# Altium PCB mini_backplane.PcbDoc (part 4 of 5)
Units mm, origin at the board's own origin, x right, y up, seen from the top; angles counter-clockwise.
Board outline 232.03 x 195 mm, 4 copper layers (Top Layer, GND, POWER, Bottom Layer); 241 components, 200 nets, 1637 pads, 676 vias.
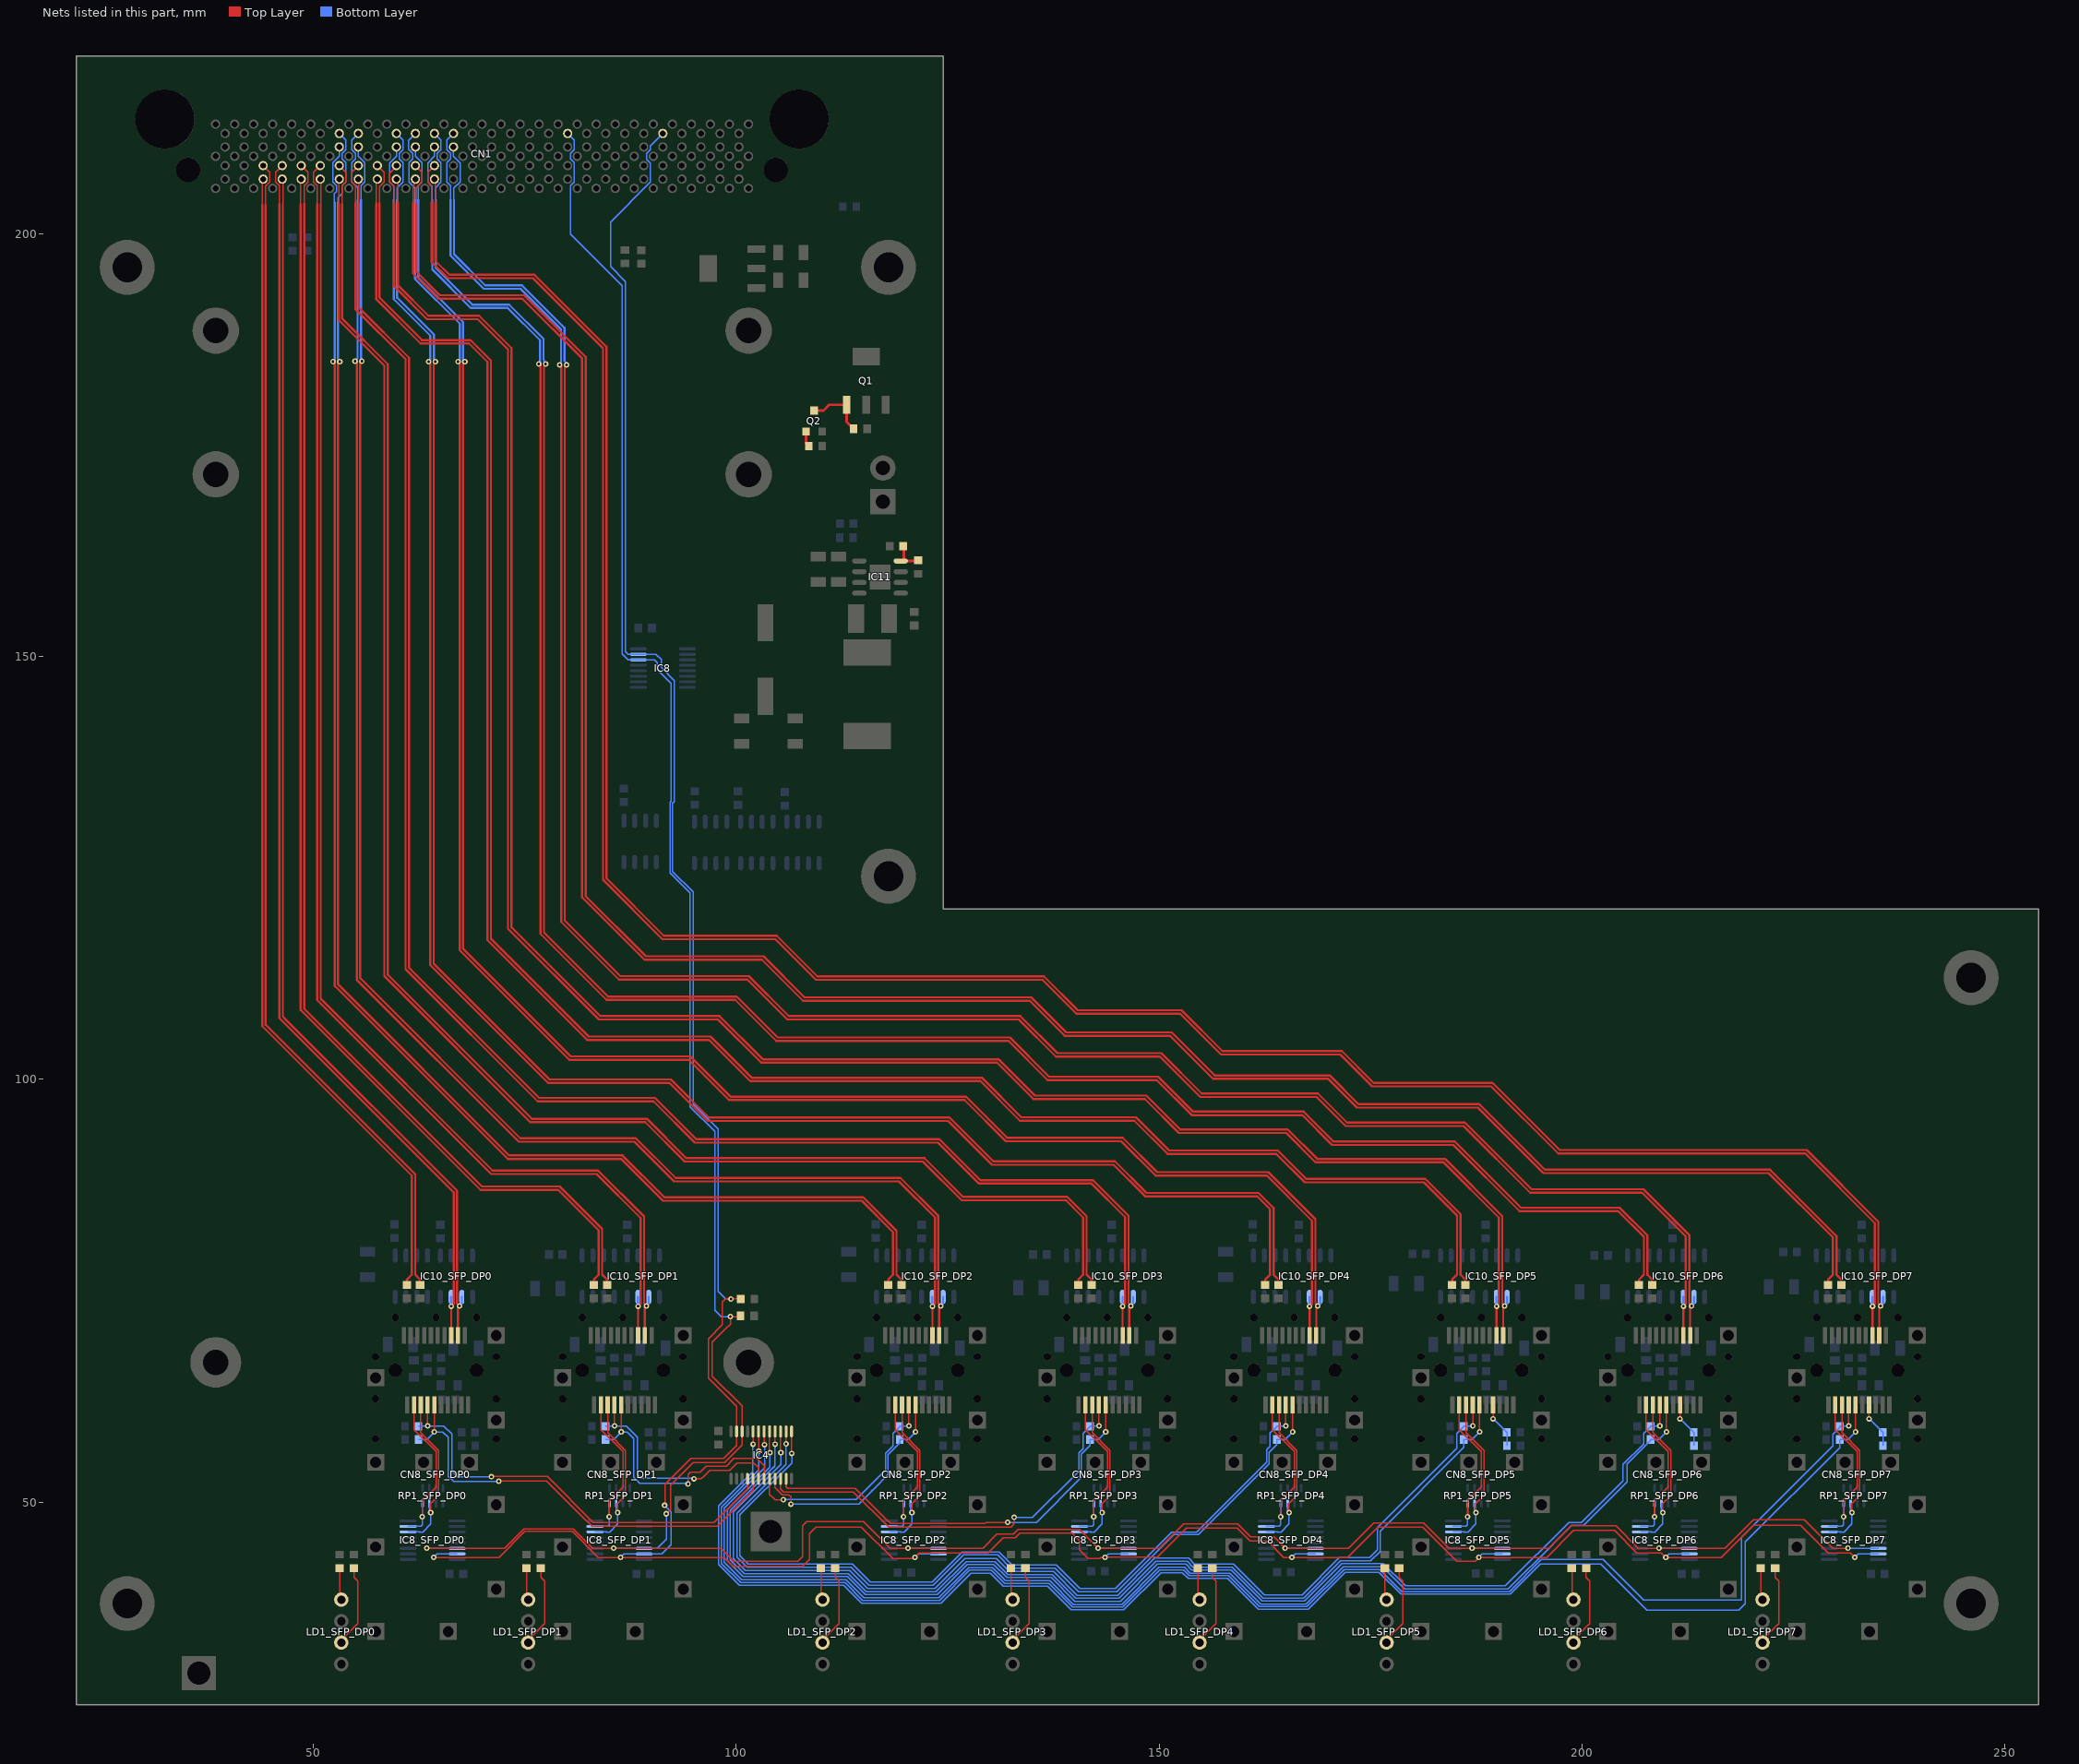
[diagram p6: the nets of this part, all layers, seen from the top]

## Via types
v1: diameter 0.66, hole 0.305, Top Layer to Bottom Layer, tented both sides, 576 vias
v2: diameter 0.711, hole 0.33, Top Layer to Bottom Layer, tented both sides, 97 vias
v3: diameter 0.66, hole 0.305, Top Layer to Bottom Layer, 3 vias

## Nets (pads, with @x,y where several pads share a name; then routed paths per layer and width w, separated by ;. In a path a pad name is that pad's centre, name@x,y a point inside that pad or via, vN(x,y) a via of type N, cw(c..) or ccw(c..) an arc to the next point about the centre after c; other vN are vias at no path point) (continued)
NetCN8_SFP_DP5_7: CN8_SFP_DP5.7 R70_SFP_DP5.2 R71_SFP_DP5.2 | length 5.5
  Top Layer w0.152: v1@189.48,59.821 CN8_SFP_DP5.7@189.48,61.494
  Bottom Layer w0.152: v1(189.484,59.842) 191.122,58.204 R71_SFP_DP5.2@191.122,56.667
NetCN8_SFP_DP6_7: CN8_SFP_DP6.7 R70_SFP_DP6.2 R71_SFP_DP6.2 | length 5.5
  Top Layer w0.152: v1@211.578,59.821 CN8_SFP_DP6.7@211.578,61.494
  Bottom Layer w0.152: v1(211.582,59.842) 213.22,58.204 R71_SFP_DP6.2@213.22,56.667
NetCN8_SFP_DP7_7: CN8_SFP_DP7.7 R70_SFP_DP7.2 R71_SFP_DP7.2 | length 5.5
  Top Layer w0.152: v1@233.93,59.821 CN8_SFP_DP7.7@233.93,61.494
  Bottom Layer w0.152: v1(233.934,59.842) 235.572,58.204 R71_SFP_DP7.2@235.572,56.667
NetIC11_4: IC11.4 R76.1 R77.2 | length 4.5
  Top Layer w0.305: R77.2@119.748,162.839 R77.2@119.748,163.043 119.812,162.979 119.812,161.214 119.745,161.28 IC11.4@119.454,161.28 121.44,161.28 R76.1@121.514,161.353
NetLD1_SFP_DP0_2: LD1_SFP_DP0.2 R9_SFP_DP0.2 | length 9.7
  Top Layer w0.152: LD1_SFP_DP0.2@53.137,33.503 55.245,35.611 55.245,40.64 54.813,41.072 R9_SFP_DP0.2@54.813,42.177
NetLD1_SFP_DP0_4: LD1_SFP_DP0.4 R10_SFP_DP0.2 | length 3.6
  Top Layer w0.152: R10_SFP_DP0.2@53.111,42.177 53.137,42.151 LD1_SFP_DP0.4@53.137,38.583
NetLD1_SFP_DP1_2: LD1_SFP_DP1.2 R9_SFP_DP1.2 | length 9.7
  Top Layer w0.152: LD1_SFP_DP1.2@75.235,33.503 77.343,35.611 77.343,40.64 76.911,41.072 R9_SFP_DP1.2@76.911,42.177
NetLD1_SFP_DP1_4: LD1_SFP_DP1.4 R10_SFP_DP1.2 | length 3.6
  Top Layer w0.152: R10_SFP_DP1.2@75.209,42.177 75.235,42.151 LD1_SFP_DP1.4@75.235,38.583
NetLD1_SFP_DP2_2: LD1_SFP_DP2.2 R9_SFP_DP2.2 | length 9.7
  Top Layer w0.152: LD1_SFP_DP2.2@110.033,33.503 112.141,35.611 112.141,40.64 111.709,41.072 R9_SFP_DP2.2@111.709,42.177
NetLD1_SFP_DP2_4: LD1_SFP_DP2.4 R10_SFP_DP2.2 | length 3.6
  Top Layer w0.152: LD1_SFP_DP2.4@110.033,38.583 R10_SFP_DP2.2@110.033,42.151
NetLD1_SFP_DP3_2: LD1_SFP_DP3.2 R9_SFP_DP3.2 | length 9.7
  Top Layer w0.152: LD1_SFP_DP3.2@132.512,33.503 134.62,35.611 134.62,40.64 134.188,41.072 R9_SFP_DP3.2@134.188,42.177
NetLD1_SFP_DP3_4: LD1_SFP_DP3.4 R10_SFP_DP3.2 | length 3.6
  Top Layer w0.152: R10_SFP_DP3.2@132.486,42.177 132.512,42.151 LD1_SFP_DP3.4@132.512,38.583
NetLD1_SFP_DP4_2: LD1_SFP_DP4.2 R9_SFP_DP4.2 | length 9.7
  Top Layer w0.152: LD1_SFP_DP4.2@154.61,33.503 156.718,35.611 156.718,40.64 156.286,41.072 R9_SFP_DP4.2@156.286,42.177
NetLD1_SFP_DP4_4: LD1_SFP_DP4.4 R10_SFP_DP4.2 | length 3.6
  Top Layer w0.152: R10_SFP_DP4.2@154.584,42.177 154.61,42.151 LD1_SFP_DP4.4@154.61,38.583
NetLD1_SFP_DP5_2: LD1_SFP_DP5.2 R9_SFP_DP5.2 | length 9.7
  Top Layer w0.152: LD1_SFP_DP5.2@176.708,33.503 178.816,35.611 178.816,40.64 178.384,41.072 R9_SFP_DP5.2@178.384,42.177
NetLD1_SFP_DP5_4: LD1_SFP_DP5.4 R10_SFP_DP5.2 | length 3.6
  Top Layer w0.152: R10_SFP_DP5.2@176.682,42.177 176.708,42.151 LD1_SFP_DP5.4@176.708,38.583
NetLD1_SFP_DP6_2: LD1_SFP_DP6.2 R9_SFP_DP6.2 | length 9.7
  Top Layer w0.152: LD1_SFP_DP6.2@198.806,33.503 200.914,35.611 200.914,40.64 200.482,41.072 R9_SFP_DP6.2@200.482,42.177
NetLD1_SFP_DP6_4: LD1_SFP_DP6.4 R10_SFP_DP6.2 | length 3.6
  Top Layer w0.152: R10_SFP_DP6.2@198.78,42.177 198.806,42.151 LD1_SFP_DP6.4@198.806,38.583
NetLD1_SFP_DP7_2: LD1_SFP_DP7.2 R9_SFP_DP7.2 | length 9.7
  Top Layer w0.152: LD1_SFP_DP7.2@221.158,33.503 223.266,35.611 223.266,40.64 222.834,41.072 R9_SFP_DP7.2@222.834,42.177
NetLD1_SFP_DP7_4: LD1_SFP_DP7.4 R10_SFP_DP7.2 | length 3.6
  Top Layer w0.152: R10_SFP_DP7.2@221.132,42.177 221.158,42.151 LD1_SFP_DP7.4@221.158,38.583
NetQ1_1: Q1.1 Q2.3 R6.1 | length 7.3
  Top Layer w0.305: Q2.3@109.22,179.075 110.318,179.075 110.993,179.751 Q1.1@113.067,179.751 113.067,177.725 R6.1@113.881,176.911
NetQ2_1: Q2.1 R11.1 | length 1.8
  Top Layer w0.305: Q2.1@108.27,176.575 108.27,175.156 R11.1@108.572,174.854
RD_OUT_SFP_DP0_N: CN1.159 CN8_SFP_DP0.12 IC10_SFP_DP0.2 | length 148.6
  Top Layer w0.152: CN1.159@46.327,206.434 46.406,206.354 46.406,203.479
  Top Layer w0.254: 46.406,203.479 46.406,107.407 47.061,106.751 ; 46.655,107.158 47.061,106.751 ; 67.109,70.841 CN8_SFP_DP0.12@67.109,69.694 67.109,72.009 ; 67.109,72.214 67.109,72.009 ; 47.061,106.751 67.005,86.808 67.005,73.482 v1(67.285,73.203) 67.109,73.027 67.109,72.009
  Bottom Layer w0.254: v1(67.285,73.203) 67.564,73.482 IC10_SFP_DP0.2@67.564,74.258
RD_OUT_SFP_DP0_P: CN1.160 CN8_SFP_DP0.13 IC10_SFP_DP0.3 | length 149.8
  Top Layer w0.152: 45.999,203.505 45.999,205.66 45.548,206.111 45.548,207.255 CN1.160@46.327,208.034
  Top Layer w0.254: 45.999,203.505 45.999,107.239 66.599,86.639 66.599,73.431 v1(66.319,73.152) ; 66.309,70.841 CN8_SFP_DP0.13@66.309,69.694 v1@66.309,73.141
  Bottom Layer w0.254: IC10_SFP_DP0.3@66.294,74.258 66.294,73.177 v1(66.319,73.152)
RD_OUT_SFP_DP1_N: CN1.153 CN8_SFP_DP1.12 IC10_SFP_DP1.2 | length 162.6
  Top Layer w0.152: CN1.153@50.827,206.434 50.876,206.384 50.876,203.505
  Top Layer w0.254: 50.876,203.505 50.876,109.525 71.196,89.205 83.658,89.205 89.103,83.76 89.103,73.482 v1(89.383,73.203) 89.207,73.027 89.207,72.009 ; 89.207,70.841 CN8_SFP_DP1.12@89.207,69.694 89.207,72.009 ; 89.207,72.214 89.207,72.009
  Bottom Layer w0.254: v1(89.383,73.203) 89.662,73.482 IC10_SFP_DP1.2@89.662,74.258
RD_OUT_SFP_DP1_P: CN1.154 CN8_SFP_DP1.13 IC10_SFP_DP1.3 | length 164.3
  Top Layer w0.152: 50.47,203.479 50.48,203.49 50.48,205.679 50.048,206.111 50.048,207.255 CN1.154@50.827,208.034
  Top Layer w0.254: 50.47,203.479 50.47,109.356 71.028,88.798 83.49,88.798 88.697,83.591 88.697,73.431 v1(88.417,73.152) ; 88.407,70.841 CN8_SFP_DP1.13@88.407,69.694 v1@88.407,73.141
  Bottom Layer w0.254: IC10_SFP_DP1.3@88.392,74.258 88.392,73.177 v1(88.417,73.152)
RD_OUT_SFP_DP2_N: CN1.24 CN8_SFP_DP2.12 IC10_SFP_DP2.2 | length 196.1
  Top Layer w0.254: v1(55.753,184.912) 55.55,184.709 55.55,111.938 74.473,93.015 88.138,93.015 92.837,88.316 119.405,88.316 123.901,83.82 123.901,73.482 v1(124.181,73.203) 124.005,73.027 124.005,72.009 ; 124.005,70.841 CN8_SFP_DP2.12@124.005,69.694 124.005,72.009 ; 124.005,72.214 124.005,72.009
  Bottom Layer w0.152: CN1.24@55.327,210.234 55.327,209.157 56.105,208.379 56.105,206.088 55.651,205.635 55.651,203.581
  Bottom Layer w0.254: 55.651,203.962 55.651,203.581 55.651,185.014 v1(55.753,184.912) ; v1(124.181,73.203) 124.46,73.482 IC10_SFP_DP2.2@124.46,74.258
RD_OUT_SFP_DP2_P: CN1.23 CN8_SFP_DP2.13 IC10_SFP_DP2.3 | length 197.7
  Top Layer w0.254: v1(54.94,184.912) 55.143,184.709 55.143,111.769 74.304,92.608 87.97,92.608 92.669,87.909 119.237,87.909 123.495,83.652 123.495,73.431 v1(123.215,73.152) ; 123.205,70.841 CN8_SFP_DP2.13@123.205,69.694 v1@123.205,73.141
  Bottom Layer w0.152: 55.245,203.759 55.245,205.413 54.548,206.11 54.548,208.379 54.98,208.811 54.98,209.479 54.548,209.911 54.548,211.055 CN1.23@55.327,211.834
  Bottom Layer w0.254: v1(54.94,184.912) 54.94,184.961 55.245,185.266 55.245,203.759 55.245,203.911 ; v1@123.19,73.177 IC10_SFP_DP2.3@123.19,74.258
RD_OUT_SFP_DP3_N: CN1.147 CN8_SFP_DP3.12 IC10_SFP_DP3.2 | length 209.8
  Top Layer w0.152: CN1.147@55.327,206.434 55.387,206.373 55.387,203.571
  Top Layer w0.254: 55.387,203.571 55.387,191.237 61.316,185.309 61.316,113.182 76.708,97.79 90.399,97.79 95.275,92.913 124.028,92.913 128.88,88.062 142.18,88.062 146.38,83.861 146.38,73.482 v1(146.66,73.203) 146.484,73.027 146.484,72.009 ; 146.484,70.841 CN8_SFP_DP3.12@146.484,69.694 146.484,72.009 ; 146.484,72.214 146.484,72.009
  Bottom Layer w0.254: v1(146.66,73.203) 146.939,73.482 IC10_SFP_DP3.2@146.939,74.258
RD_OUT_SFP_DP3_P: CN1.148 CN8_SFP_DP3.13 IC10_SFP_DP3.3 | length 211.6
  Top Layer w0.152: 54.981,203.632 54.981,205.655 54.548,206.088 54.548,207.255 CN1.148@55.327,208.034
  Top Layer w0.254: 54.981,203.632 54.981,191.069 60.909,185.141 60.909,113.014 76.54,97.384 90.23,97.384 95.107,92.507 123.86,92.507 128.711,87.655 142.011,87.655 145.974,83.693 145.974,73.431 v1(145.694,73.152) ; 145.684,70.841 CN8_SFP_DP3.13@145.684,69.694 v1@145.684,73.141
  Bottom Layer w0.254: IC10_SFP_DP3.3@145.669,74.258 145.669,73.177 v1(145.694,73.152)
RD_OUT_SFP_DP4_N: CN1.33 CN8_SFP_DP4.12 IC10_SFP_DP4.2 | length 228.6
  Top Layer w0.254: v1(67.92,184.836) 67.716,184.633 67.716,115.418 80.442,102.692 94.564,102.692 99.314,97.942 127.152,97.942 132.029,93.066 145.694,93.066 149.758,89.002 162.906,89.002 168.478,83.43 168.478,73.482 v1(168.758,73.203) 168.582,73.027 168.582,72.009 ; 168.582,70.841 CN8_SFP_DP4.12@168.582,69.694 168.582,72.009 ; 168.582,72.214 168.582,72.009
  Bottom Layer w0.152: CN1.33@62.077,210.234 62.077,209.157 62.855,208.379 62.855,206.088 62.423,205.656 62.423,203.709
  Bottom Layer w0.254: 62.422,203.987 62.422,203.708 62.422,194.804 67.716,189.509 67.716,185.522 ; 67.716,185.369 67.716,185.522 ; v1(67.92,184.836) 67.716,185.039 67.716,185.522 ; v1(168.758,73.203) 169.037,73.482 IC10_SFP_DP4.2@169.037,74.258
RD_OUT_SFP_DP4_P: CN1.32 CN8_SFP_DP4.13 IC10_SFP_DP4.3 | length 230.9
  Top Layer w0.254: v1@67.31,184.836 v1(67.107,184.836) 67.31,184.633 67.31,115.249 80.273,102.286 94.396,102.286 99.146,97.536 126.984,97.536 131.861,92.659 145.526,92.659 149.59,88.595 162.738,88.595 168.072,83.261 168.072,73.431 v1(167.792,73.152) ; 167.782,70.841 CN8_SFP_DP4.13@167.782,69.694 v1@167.782,73.141
  Bottom Layer w0.152: 62.016,203.987 62.016,205.393 61.298,206.111 61.298,208.379 61.73,208.811 61.73,209.479 61.247,209.962 61.247,211.004 CN1.32@62.077,211.834
  Bottom Layer w0.254: 62.016,203.987 62.016,194.635 67.31,189.341 67.31,186.106 ; v1(67.107,184.836) 67.31,185.039 67.31,186.106 ; 67.31,185.369 67.31,186.106 ; IC10_SFP_DP4.3@167.767,74.258 167.767,73.177 v1(167.792,73.152)
RD_OUT_SFP_DP5_N: CN1.141 CN8_SFP_DP5.12 IC10_SFP_DP5.2 | length 245.7
  Top Layer w0.152: CN1.141@59.827,206.434 59.995,206.265 59.995,203.632
  Top Layer w0.254: 59.995,203.632 59.995,193.894 63.618,190.271 69.612,190.271 73.431,186.452 73.431,117.958 83.922,107.467 98.019,107.467 103.124,102.362 131.013,102.362 135.306,98.069 148.488,98.069 152.502,94.056 165.202,94.056 168.681,90.576 183.81,90.576 190.576,83.811 190.576,73.482 v1(190.856,73.203) 190.68,73.027 190.68,72.009 ; 190.68,70.841 CN8_SFP_DP5.12@190.68,69.694 190.68,72.009 ; 190.68,72.214 190.68,72.009
  Bottom Layer w0.254: v1(190.856,73.203) 191.135,73.482 IC10_SFP_DP5.2@191.135,74.258
RD_OUT_SFP_DP5_P: CN1.142 CN8_SFP_DP5.13 IC10_SFP_DP5.3 | length 247.5
  Top Layer w0.152: 59.588,203.581 59.588,205.548 59.048,206.088 59.048,207.155 59.827,207.934 CN1.142@59.827,208.034
  Top Layer w0.254: 59.588,203.581 59.588,193.726 63.449,189.865 69.444,189.865 73.025,186.284 73.025,117.789 83.753,107.061 97.85,107.061 102.956,101.956 130.845,101.956 135.137,97.663 148.32,97.663 152.333,93.65 165.033,93.65 168.513,90.17 183.642,90.17 190.17,83.642 190.17,73.431 v1(189.89,73.152) ; 189.88,70.841 CN8_SFP_DP5.13@189.88,69.694 v1@189.88,73.141
  Bottom Layer w0.254: IC10_SFP_DP5.3@189.865,74.258 189.865,73.177 v1(189.89,73.152)
RD_OUT_SFP_DP6_N: CN1.39 CN8_SFP_DP6.12 IC10_SFP_DP6.2 | length 263.2
  Top Layer w0.254: v1(79.934,184.48) 79.731,184.277 79.731,118.77 86.309,112.192 101.498,112.192 106.223,107.467 133.579,107.467 137.973,103.073 150.266,103.073 155.042,98.298 168.783,98.298 172.212,94.869 186.157,94.869 194.031,86.995 207.255,86.995 212.674,81.575 212.674,73.482 v1(212.954,73.203) 212.778,73.027 212.778,72.009 ; 212.778,70.841 CN8_SFP_DP6.12@212.778,69.694 212.778,72.009 ; 212.778,72.214 212.778,72.009
  Bottom Layer w0.152: CN1.39@66.577,210.234 66.577,209.135 67.355,208.356 67.355,206.088 66.637,205.371 66.637,203.987
  Bottom Layer w0.254: 66.637,203.987 66.637,197.561 70.32,193.878 74.667,193.878 79.705,188.84 79.705,184.937 79.934,184.709 v1(79.934,184.48) ; v1(212.954,73.203) 213.233,73.482 IC10_SFP_DP6.2@213.233,74.258
RD_OUT_SFP_DP6_P: CN1.38 CN8_SFP_DP6.13 IC10_SFP_DP6.3 | length 266.1
  Top Layer w0.254: v1(79.121,184.48) 79.324,184.277 79.324,118.602 86.141,111.785 101.33,111.785 106.054,107.061 133.41,107.061 137.804,102.667 150.098,102.667 154.873,97.892 168.615,97.892 172.044,94.463 185.988,94.463 193.862,86.589 207.086,86.589 212.268,81.407 212.268,73.431 v1(211.988,73.152) ; 211.978,70.841 CN8_SFP_DP6.13@211.978,69.694 v1@211.978,73.141
  Bottom Layer w0.152: 66.231,203.987 66.231,205.678 65.798,206.111 65.798,208.379 66.23,208.811 66.23,209.479 65.798,209.911 65.798,211.055 CN1.38@66.577,211.834
  Bottom Layer w0.254: 66.231,203.987 66.231,197.393 70.152,193.472 74.498,193.472 79.299,188.671 79.299,186.69 ; v1(79.121,184.48) 79.299,184.658 79.299,186.69 ; 79.299,185.242 79.299,186.69 ; IC10_SFP_DP6.3@211.963,74.258 211.963,73.177 v1(211.988,73.152)
RD_OUT_SFP_DP7_N: CN1.135 CN8_SFP_DP7.12 IC10_SFP_DP7.2 | length 287.2
  Top Layer w0.152: CN1.135@64.327,206.434 64.44,206.32 64.44,203.657
  Top Layer w0.254: 64.44,203.581 64.44,196.774 ; 64.44,203.657 64.44,196.774 ; 235.13,70.841 CN8_SFP_DP7.12@235.13,69.694 235.13,72.009 ; 235.13,72.214 235.13,72.009 ; 64.44,196.774 66.091,195.123 76.14,195.123 84.658,186.604 84.658,123.749 91.44,116.967 104.8,116.967 109.601,112.166 136.373,112.166 140.386,108.153 152.654,108.153 157.48,103.327 171.602,103.327 175.362,99.568 189.408,99.568 197.358,91.618 226.559,91.618 235.026,83.15 235.026,73.482 v1(235.306,73.203) 235.13,73.027 235.13,72.009
  Bottom Layer w0.254: v1(235.306,73.203) 235.585,73.482 IC10_SFP_DP7.2@235.585,74.258
RD_OUT_SFP_DP7_P: CN1.136 CN8_SFP_DP7.13 IC10_SFP_DP7.3 | length 282.1
  Top Layer w0.152: 63.981,203.657 63.981,205.678 63.548,206.111 63.548,207.255 CN1.136@64.327,208.034
  Top Layer w0.254: 63.981,203.657 63.981,196.658 65.922,194.716 75.971,194.716 84.252,186.436 84.252,123.58 91.272,116.561 104.632,116.561 109.433,111.76 136.204,111.76 140.217,107.747 152.486,107.747 157.312,102.921 171.434,102.921 175.193,99.162 189.239,99.162 197.19,91.211 226.39,91.211 234.62,82.982 234.62,73.431 v1(234.34,73.152) ; 234.33,70.841 CN8_SFP_DP7.13@234.33,69.694 v1@234.33,73.141
  Bottom Layer w0.254: IC10_SFP_DP7.3@234.315,74.258 234.315,73.177 v1(234.34,73.152)
SCL_AUX: CN1.56 IC4.22 IC8.14 IC8_SFP_DP0.14 IC8_SFP_DP1.14 IC8_SFP_DP2.14 IC8_SFP_DP3.14 IC8_SFP_DP4.14 IC8_SFP_DP5.14 IC8_SFP_DP6.14 IC8_SFP_DP7.14 R3.1 | length 407.4
  Top Layer w0.152: v1(63.424,44.552) 72.619,44.552 74.905,46.838 80.746,46.838 83.032,44.552 v1(85.522,44.552) 98.196,44.552 99.746,43.002 107.315,43.002 107.874,43.561 107.874,47.193 108.356,47.676 115.062,47.676 118.186,44.552 v1(120.32,44.552) 129.159,44.552 130.835,46.228 132.766,46.228 133.299,46.761 140.589,46.761 v1(142.799,44.552) 150.038,44.552 152.883,47.396 159.283,47.396 160.807,45.872 163.576,45.872 v1(164.897,44.552) 172.39,44.552 175.387,47.549 181.28,47.549 184.277,44.552 v1(186.995,44.552) 196.063,44.552 198.704,47.193 204.013,47.193 206.654,44.552 v1(209.093,44.552) 216.865,44.552 220.243,47.93 226.263,47.93 229.641,44.552 v1(231.445,44.552) ; v1(91.745,48.616) 92.227,49.098 92.227,51.994 94.92,54.686 98.628,54.686 100.697,56.755 IC4.22@100.697,58.35 100.697,61.355 97.18,64.872 97.18,68.91 98.628,70.358 ; 98.958,70.688 98.628,70.358 ; R3.1@100.521,72.009 100.444,71.933 v1(99.314,71.933) 99.314,71.044 98.628,70.358
  Bottom Layer w0.152: v1(63.424,44.552) 66.974,44.552 IC8_SFP_DP0.14@67.01,44.516 ; CN1.56@80.077,211.834 80.855,211.055 80.855,209.911 80.423,209.479 80.423,208.811 80.855,208.379 80.855,206.088 80.423,205.656 80.423,199.92 86.538,193.805 86.538,190.246 ; v1(85.522,44.552) 89.072,44.552 IC8_SFP_DP1.14@89.108,44.516 90.643,44.516 91.745,45.618 v1(91.745,48.616) ; 86.538,190.729 86.538,190.246 ; v1(99.314,71.933) 98.222,71.933 97.46,72.695 97.46,93.828 94.544,96.744 94.544,122.016 92.177,124.383 92.177,132.74 92.329,132.893 92.329,146.787 90.678,148.438 90.678,149.276 90.363,149.59 IC8.14@88.438,149.59 87.214,149.59 86.538,150.266 86.538,190.246 ; v1(120.32,44.552) 123.87,44.552 IC8_SFP_DP2.14@123.906,44.516 ; v1(142.799,44.552) 146.349,44.552 IC8_SFP_DP3.14@146.385,44.516 ; v1(164.897,44.552) 168.447,44.552 IC8_SFP_DP4.14@168.483,44.516 ; v1(186.995,44.552) 190.545,44.552 IC8_SFP_DP5.14@190.581,44.516 ; v1(209.093,44.552) 212.643,44.552 IC8_SFP_DP6.14@212.679,44.516 ; v1(231.445,44.552) 234.995,44.552 IC8_SFP_DP7.14@235.031,44.516
SCL_SFP0: CN8_SFP_DP0.5 IC4.5 R22_SFP_DP0.1 | length 54.6
  Top Layer w0.152: CN8_SFP_DP0.5@64.309,61.494 64.309,58.297 v1(64.313,58.293) ; v1(71.933,52.476) 77.597,52.476 81.763,48.311 81.765,48.311 82.959,47.117 88.671,47.117 ; 89.611,47.117 88.671,47.117 ; IC4.5@101.997,52.75 101.997,51.374 97.739,47.117 88.671,47.117
  Bottom Layer w0.152: R22_SFP_DP0.1@62.446,57.404 63.424,57.404 v1(64.313,58.293) 65.329,58.293 65.964,57.658 65.964,53.061 66.599,52.426 71.882,52.426 v1(71.933,52.476)
SCL_SFP1: CN8_SFP_DP1.5 IC4.7 R22_SFP_DP1.1 | length 31.3
  Top Layer w0.152: CN8_SFP_DP1.5@86.407,61.494 86.407,58.297 v1(86.411,58.293) ; v1(94.31,52.146) 94.31,53.238 94.615,53.543 95.733,53.543 96.431,54.242 98.844,54.242 99.746,55.143 102.464,55.143 103.297,54.31 IC4.7@103.297,52.75
  Bottom Layer w0.152: R22_SFP_DP1.1@84.544,57.404 85.522,57.404 v1(86.411,58.293) 87.122,58.293 87.909,57.506 87.909,52.908 88.621,52.197 94.259,52.197 v1(94.31,52.146)
SCL_SFP2: CN8_SFP_DP2.5 IC4.9 R22_SFP_DP2.1 | length 27.8
  Top Layer w0.152: IC4.9@104.597,52.75 104.597,51.715 105.435,50.876 106.223,50.876 106.477,50.622 v1(106.477,49.759) ; CN8_SFP_DP2.5@121.205,61.494 121.205,58.297 v1(121.209,58.293)
  Bottom Layer w0.152: v1(106.477,49.759) 114.478,49.759 116.345,51.625 ; 116.002,51.283 116.345,51.625 ; v1(121.209,58.293) 120.32,57.404 R22_SFP_DP2.1@119.342,57.404 119.342,57.01 117.958,55.626 117.958,53.238 116.345,51.625
SCL_SFP3: CN8_SFP_DP3.5 IC4.11 R22_SFP_DP3.1 | length 50.3
  Top Layer w0.152: IC4.11@105.897,52.75 105.897,51.812 106.096,51.613 114.071,51.613 117.551,48.133 117.577,48.133 118.262,47.447 129.388,47.447 129.54,47.6 v1(132.08,47.6) ; CN8_SFP_DP3.5@143.684,61.494 143.684,58.297 v1(143.688,58.293)
  Bottom Layer w0.152: v1(132.08,47.6) 135.509,47.6 140.818,52.908 140.818,55.677 141.821,56.68 R22_SFP_DP3.1@141.821,57.404 142.799,57.404 v1(143.688,58.293)
SCL_SFP4: CN8_SFP_DP4.5 IC4.14 R22_SFP_DP4.1 | length 99.8
  Top Layer w0.152: v1(105.893,56.871) 105.897,56.875 IC4.14@105.897,58.35 ; CN8_SFP_DP4.5@165.782,61.494 165.782,58.297 v1(165.786,58.293)
  Bottom Layer w0.152: v1(105.893,56.871) 105.893,54.477 100.076,48.661 100.076,43.491 101.276,42.291 113.595,42.291 115.703,40.183 123.311,40.183 126.867,43.739 130.917,43.739 132.467,42.189 137.699,42.189 140.493,39.395 144.983,39.395 151.74,46.152 154.661,46.152 163.017,54.508 163.017,55.88 163.919,56.782 R22_SFP_DP4.1@163.919,57.404 164.897,57.404 v1(165.786,58.293)
SCL_SFP5: CN8_SFP_DP5.5 IC4.16 R22_SFP_DP5.1 | length 128.1
  Top Layer w0.152: v1(104.597,56.845) IC4.16@104.597,58.35 ; CN8_SFP_DP5.5@187.88,61.494 187.88,58.297 v1(187.884,58.293)
  Bottom Layer w0.152: 104.496,54.194 104.196,53.894 ; v1(104.597,56.845) 104.597,54.295 104.196,53.894 ; v1(187.884,58.293) 186.995,57.404 R22_SFP_DP5.1@186.017,57.404 186.017,56.451 176.124,46.558 176.124,44.171 175.006,43.053 171.461,43.053 167.067,38.659 162.29,38.659 158.633,42.316 153.985,42.316 153.324,42.977 149.647,42.977 145.278,38.608 140.167,38.608 137.373,41.402 132.141,41.402 130.591,42.951 127.193,42.951 123.637,39.395 115.377,39.395 113.268,41.504 100.949,41.504 99.289,43.164 99.289,48.987 104.196,53.894
SCL_SFP6: CN8_SFP_DP6.5 IC4.18 R22_SFP_DP6.1 | length 153.1
  Top Layer w0.152: IC4.18@103.297,58.35 103.297,56.85 v1(103.353,56.794) ; CN8_SFP_DP6.5@209.978,61.494 209.978,58.297 v1(209.982,58.293)
  Bottom Layer w0.152: v1(103.353,56.794) 103.353,54.057 98.577,49.281 98.577,42.87 100.655,40.792 112.974,40.792 115.082,38.684 123.932,38.684 127.488,42.24 130.297,42.24 131.846,40.691 137.078,40.691 139.872,37.897 145.573,37.897 149.942,42.266 153.03,42.266 153.69,41.605 158.338,41.605 161.996,37.948 167.361,37.948 171.756,42.342 176.428,42.342 179.045,39.726 187.249,39.726 ; 186.741,39.726 187.249,39.726 ; v1(209.982,58.293) 209.093,57.404 R22_SFP_DP6.1@208.115,57.404 208.115,57.3 205.308,54.493 205.308,52.375 200.177,47.244 198.755,47.244 196.52,45.009 196.52,44.983 191.262,39.726 187.249,39.726
SCL_SFP7: CN8_SFP_DP7.5 IC4.20 R22_SFP_DP7.1 | length 184
  Top Layer w0.152: IC4.20@101.997,58.35 101.997,56.855 v1(102.006,56.845) ; CN8_SFP_DP7.5@232.33,61.494 232.33,58.297 v1(232.334,58.293)
  Bottom Layer w0.152: v1(102.006,56.845) 101.974,56.813 101.974,53.576 97.942,49.544 97.942,42.607 100.392,40.157 112.711,40.157 114.819,38.049 124.195,38.049 127.751,41.605 130.034,41.605 131.583,40.056 136.815,40.056 139.609,37.262 145.836,37.262 150.205,41.631 152.767,41.631 153.427,40.97 158.075,40.97 161.733,37.313 167.624,37.313 172.019,41.707 175.997,41.707 178.587,39.116 191.515,39.116 195.096,42.697 202.209,42.697 207.696,37.211 218.542,37.211 219.304,37.973 219.304,45.263 230.454,56.413 230.454,57.391 R22_SFP_DP7.1@230.467,57.404 231.445,57.404 v1(232.334,58.293)
SDA_AUX: CN1.71 IC4.23 IC8.15 IC8_SFP_DP0.15 IC8_SFP_DP1.15 IC8_SFP_DP2.15 IC8_SFP_DP3.15 IC8_SFP_DP4.15 IC8_SFP_DP5.15 IC8_SFP_DP6.15 IC8_SFP_DP7.15 R4.1 | length 407.3
  Top Layer w0.152: v1(64.237,43.459) 71.958,43.459 75.032,46.533 80.62,46.533 83.693,43.459 v1(86.335,43.459) 98.552,43.459 99.593,42.418 107.848,42.418 108.661,43.231 108.661,46.253 109.449,47.041 114.783,47.041 118.516,43.307 120.98,43.307 v1(121.133,43.459) 121.666,43.993 129.794,43.993 131.572,45.771 132.994,45.771 133.553,46.33 139.7,46.33 140.602,45.428 140.602,44.336 141.63,43.307 142.951,43.307 143.104,43.459 v1(143.612,43.459) 143.618,43.466 149.79,43.466 153.238,46.914 159.233,46.914 160.757,45.39 162.814,45.39 164.744,43.459 v1(165.71,43.459) 172.263,43.459 175.844,47.041 181.178,47.041 185.217,43.002 187.35,43.002 v1(187.808,43.459) 195.809,43.459 198.984,46.634 203.835,46.634 206.477,43.993 209.372,43.993 v1(209.906,43.459) 216.459,43.459 220.269,47.269 225.806,47.269 229.083,43.993 231.724,43.993 v1(232.258,43.459) ; v1(91.542,49.606) 91.592,49.657 91.592,52.121 94.64,55.169 98.527,55.169 100.047,56.689 IC4.23@100.047,58.35 100.047,61.32 96.698,64.668 96.698,69.317 98.374,70.993 98.374,73.635 98.755,74.016 v1(99.39,74.016) 100.521,74.016 R4.1@100.546,73.99
  Bottom Layer w0.152: v1(64.237,43.459) 64.644,43.866 IC8_SFP_DP0.15@67.01,43.866 ; v1(86.335,43.459) 86.742,43.866 IC8_SFP_DP1.15@89.108,43.866 91.187,43.866 92.304,44.983 92.304,48.847 91.544,49.606 v1(91.542,49.606) ; 86.919,190.348 86.919,189.992 ; CN1.71@91.327,211.834 89.855,210.362 89.855,209.911 89.423,209.479 89.423,208.788 89.855,208.356 89.855,206.088 85.141,201.374 85.141,196.113 86.919,194.335 86.919,189.992 ; v1(99.39,74.016) 98.755,74.016 97.866,74.905 97.866,94.107 94.894,97.079 94.894,122.149 92.481,124.562 92.481,132.614 92.71,132.843 92.71,147.117 91.135,148.692 91.135,149.631 90.526,150.24 IC8.15@88.438,150.24 87.224,150.24 86.919,150.546 86.919,189.992 ; v1(121.133,43.459) 121.54,43.866 IC8_SFP_DP2.15@123.906,43.866 ; v1(143.612,43.459) 144.019,43.866 IC8_SFP_DP3.15@146.385,43.866 ; v1(165.71,43.459) 166.117,43.866 IC8_SFP_DP4.15@168.483,43.866 ; v1(187.808,43.459) 188.215,43.866 IC8_SFP_DP5.15@190.581,43.866 ; v1(209.906,43.459) 210.313,43.866 IC8_SFP_DP6.15@212.679,43.866 ; v1(232.258,43.459) 232.665,43.866 IC8_SFP_DP7.15@235.031,43.866
SDA_SFP0: CN8_SFP_DP0.4 IC4.4 R21_SFP_DP0.1 | length 51.7
  Top Layer w0.152: v1@63.509,59.021 CN8_SFP_DP0.4@63.509,61.494 ; v1(71.069,52.984) 71.12,53.035 77.673,53.035 83.109,47.6 89.51,47.6 ; 89.611,47.6 89.51,47.6 ; IC4.4@101.347,52.75 101.347,51.563 97.384,47.6 89.51,47.6
  Bottom Layer w0.152: R21_SFP_DP0.1@62.446,58.953 62.497,59.004 v1(63.525,59.004) 65.43,59.004 66.396,58.039 66.396,53.619 67.031,52.984 v1(71.069,52.984)
SDA_SFP1: CN8_SFP_DP1.4 IC4.6 R21_SFP_DP1.1 | length 30.1
  Top Layer w0.152: CN8_SFP_DP1.4@85.607,61.494 85.607,59.021 v1(85.623,59.004) ; v1(95.021,52.756) 95.86,52.756 96.164,53.061 ; 95.91,52.807 96.164,53.061 ; IC4.6@102.647,52.75 102.647,54.046 102.057,54.635 100.101,54.635 99.225,53.759 96.863,53.759 96.164,53.061
  Bottom Layer w0.152: R21_SFP_DP1.1@84.544,58.953 84.595,59.004 v1(85.623,59.004) 86.995,59.004 88.341,57.658 88.341,53.238 88.773,52.807 91.415,52.807 ; 93.04,52.807 91.415,52.807 ; v1(95.021,52.756) 94.971,52.807 91.415,52.807
SDA_SFP2: CN8_SFP_DP2.4 IC4.8 R21_SFP_DP2.1 | length 26.8
  Top Layer w0.152: IC4.8@103.947,52.75 103.947,50.917 104.496,50.368 ; 104.572,50.292 104.496,50.368 ; v1(105.562,50.267) 104.597,50.267 104.496,50.368 ; CN8_SFP_DP2.4@120.405,61.494 120.405,59.021 v1(120.421,59.004)
  Bottom Layer w0.152: v1(105.562,50.267) 105.613,50.317 106.708,50.317 114.198,50.317 117.653,53.772 117.653,55.752 118.516,56.616 118.516,58.128 R21_SFP_DP2.1@119.342,58.953 119.393,59.004 v1(120.421,59.004)
SDA_SFP3: CN8_SFP_DP3.4 IC4.10 R21_SFP_DP3.1 | length 51.4
  Top Layer w0.152: IC4.10@105.247,52.75 105.247,51.573 105.613,51.206 110.261,51.206 ; 110.668,51.206 110.261,51.206 ; v1(132.867,48.184) 132.893,48.158 132.893,47.447 132.486,47.041 118.034,47.041 113.868,51.206 110.261,51.206 ; CN8_SFP_DP3.4@142.884,61.494 142.884,59.021 v1(142.9,59.004)
  Bottom Layer w0.152: v1@132.893,48.158 135.026,48.158 140.513,53.645 140.513,55.803 140.995,56.286 140.995,58.128 R21_SFP_DP3.1@141.821,58.953 141.872,59.004 v1(142.9,59.004)
SDA_SFP4: CN8_SFP_DP4.4 IC4.13 R21_SFP_DP4.1 | length 98.6
  Top Layer w0.152: IC4.13@106.547,58.35 106.547,55.785 v1(106.578,55.753) ; CN8_SFP_DP4.4@164.982,61.494 164.982,59.021 v1(164.998,59.004)
  Bottom Layer w0.152: v1(106.578,55.753) 106.578,54.63 100.453,48.504 100.453,43.647 101.432,42.668 113.751,42.668 115.859,40.56 123.155,40.56 126.711,44.116 131.074,44.116 132.623,42.567 137.855,42.567 140.649,39.773 144.827,39.773 151.511,46.457 154.457,46.457 162.712,54.712 162.712,56.185 163.119,56.591 163.119,58.153 R21_SFP_DP4.1@163.919,58.953 163.97,59.004 v1(164.998,59.004)
SDA_SFP5: CN8_SFP_DP5.4 IC4.15 R21_SFP_DP5.1 | length 126.5
  Top Layer w0.152: IC4.15@105.247,58.35 105.247,55.891 v1(105.283,55.855) ; CN8_SFP_DP5.4@187.08,61.494 187.08,59.021 v1(187.096,59.004)
  Bottom Layer w0.152: v1(105.283,55.855) 105.283,54.442 99.67,48.829 99.67,43.322 101.107,41.885 113.426,41.885 115.534,39.776 123.48,39.776 127.036,43.332 130.749,43.332 132.298,41.783 137.531,41.783 140.325,38.989 145.12,38.989 149.489,43.358 153.482,43.358 154.142,42.697 158.791,42.697 162.448,39.04 166.909,39.04 171.303,43.434 174.904,43.434 175.819,44.348 175.819,46.99 185.191,56.363 185.191,58.128 R21_SFP_DP5.1@186.017,58.953 186.068,59.004 v1(187.096,59.004)
SDA_SFP6: CN8_SFP_DP6.4 IC4.17 R21_SFP_DP6.1 | length 151.3
  Top Layer w0.152: IC4.17@103.947,58.35 103.947,55.87 v1(103.988,55.829) ; CN8_SFP_DP6.4@209.178,61.494 209.178,59.021 v1(209.194,59.004)
  Bottom Layer w0.152: v1(103.988,55.829) 103.988,54.153 98.958,49.124 98.958,43.028 100.813,41.173 113.132,41.173 115.24,39.065 123.774,39.065 127.33,42.621 130.454,42.621 132.004,41.072 137.236,41.072 140.03,38.278 145.415,38.278 149.784,42.647 153.187,42.647 153.848,41.986 158.496,41.986 162.154,38.329 167.204,38.329 171.598,42.723 176.479,42.723 179.121,40.081 190.932,40.081 198.425,47.574 199.923,47.574 204.826,52.476 204.826,54.442 207.264,56.88 207.264,58.103 R21_SFP_DP6.1@208.115,58.953 208.166,59.004 v1(209.194,59.004)
SDA_SFP7: CN8_SFP_DP7.4 IC4.19 R21_SFP_DP7.1 | length 182.1
  Top Layer w0.152: IC4.19@102.647,58.35 102.647,56.027 v1(102.667,56.007) ; CN8_SFP_DP7.4@231.53,61.494 231.53,59.021 v1(231.546,59.004)
  Bottom Layer w0.152: v1(102.667,56.007) 102.667,53.802 98.273,49.408 98.273,42.744 100.529,40.488 112.848,40.488 114.956,38.379 124.058,38.379 127.614,41.935 130.17,41.935 131.72,40.386 136.952,40.386 139.746,37.592 145.699,37.592 150.068,41.961 152.903,41.961 153.564,41.3 158.212,41.3 161.87,37.643 167.488,37.643 171.882,42.037 176.097,42.037 178.714,39.421 191.388,39.421 195.198,43.231 202.463,43.231 207.289,38.405 218.872,38.405 218.872,45.843 229.641,56.612 229.641,57.986 230.467,58.811 R21_SFP_DP7.1@230.467,58.953 230.518,59.004 v1(231.546,59.004)
SFP_TX0_N: C74_SFP_DP0.1 CN1.162 | length 138.4
  Top Layer w0.152: 43.967,203.387 43.967,206.324 CN1.162@44.077,206.434
  Top Layer w0.254: 43.967,203.387 43.967,106.274 61.646,88.595 61.646,76.886 61.062,76.302 C74_SFP_DP0.1@61.062,75.679
SFP_TX0_P: C73_SFP_DP0.1 CN1.163 | length 140.4
  Top Layer w0.152: CN1.163@44.077,208.034 44.855,207.255 44.855,206.111 44.374,205.63 44.374,203.352
  Top Layer w0.254: 44.374,203.352 44.374,106.442 62.052,88.764 62.052,76.886 62.636,76.302 C73_SFP_DP0.1@62.636,75.679
SFP_TX1_N: C74_SFP_DP1.1 CN1.156 | length 151
  Top Layer w0.152: 48.516,203.503 48.516,206.373 CN1.156@48.577,206.434
  Top Layer w0.254: 48.516,203.503 48.516,108.177 69.774,86.919 78.969,86.919 83.744,82.144 83.744,76.886 83.16,76.302 C74_SFP_DP1.1@83.16,75.679
SFP_TX1_P: C73_SFP_DP1.1 CN1.157 | length 153.1
  Top Layer w0.152: CN1.157@48.577,208.034 49.355,207.255 49.355,206.111 48.922,205.678 48.922,203.53
  Top Layer w0.254: 48.922,203.53 48.922,108.345 69.942,87.325 79.137,87.325 84.15,82.312 84.15,76.886 84.734,76.302 C73_SFP_DP1.1@84.734,75.679
SFP_TX2_N: C74_SFP_DP2.1 CN1.21 | length 185.2
  Top Layer w0.254: v1@52.527,184.81 v1@52.527,184.658 ; v1@52.527,184.861 v1(52.324,184.861) v1@52.527,184.658 ; C74_SFP_DP2.1@117.958,75.679 117.958,76.302 118.542,76.886 118.542,81.924 114.843,85.623 91.348,85.623 86.395,90.576 72.984,90.576 52.527,111.033 v1@52.527,184.658
  Bottom Layer w0.152: 52.527,203.657 52.502,203.683 52.502,204.724 52.73,204.952 52.73,205.679 52.298,206.111 52.298,208.379 53.077,209.157 CN1.21@53.077,210.234
  Bottom Layer w0.254: v1(52.324,184.861) 52.527,185.064 52.527,202.413 ; 52.527,202.692 52.527,202.413 ; 52.527,203.657 52.527,202.413
SFP_TX2_P: C73_SFP_DP2.1 CN1.20 | length 187.3
  Top Layer w0.254: v1(53.137,184.861) 52.976,185.022 52.934,185.022 52.934,111.201 73.152,90.983 86.563,90.983 91.516,86.03 115.011,86.03 118.948,82.093 118.948,76.886 119.532,76.302 C73_SFP_DP2.1@119.532,75.679
  Bottom Layer w0.152: 52.934,203.327 52.934,204.26 53.423,204.749 53.423,205.679 53.855,206.111 53.855,208.379 53.423,208.811 53.423,209.479 53.855,209.911 53.855,211.055 CN1.20@53.077,211.834
  Bottom Layer w0.254: 52.934,203.657 52.934,203.327 52.934,185.064 v1(53.137,184.861)
SFP_TX3_N: C74_SFP_DP3.1 CN1.150 | length 199.4
  Top Layer w0.152: 53.016,203.499 53.016,206.373 CN1.150@53.077,206.434
  Top Layer w0.254: 53.016,203.499 53.016,189.757 53.213,189.56 ; 53.061,189.713 53.213,189.56 ; C74_SFP_DP3.1@140.437,75.679 140.437,76.302 141.021,76.886 141.021,83.642 138.989,85.674 126.67,85.674 122.072,90.272 93.904,90.272 89.256,94.92 75.651,94.92 58.395,112.176 58.395,184.379 53.213,189.56
SFP_TX3_P: C73_SFP_DP3.1 CN1.151 | length 201.2
  Top Layer w0.152: CN1.151@53.077,208.034 53.855,207.255 53.855,206.111 53.422,205.678 53.422,203.505
  Top Layer w0.254: 53.422,203.505 53.422,189.926 58.801,184.547 58.801,112.344 75.819,95.326 89.424,95.326 94.072,90.678 122.241,90.678 126.817,86.101 139.136,86.101 141.427,83.811 141.427,76.886 142.011,76.302 C73_SFP_DP3.1@142.011,75.679
SFP_TX4_N: C74_SFP_DP4.1 CN1.30 | length 219.8
  Top Layer w0.254: v1(63.627,184.861) 63.83,184.658 63.83,113.497 77.759,99.568 92.11,99.568 96.606,95.072 125.054,95.072 130.235,89.891 144.612,89.891 148.345,86.157 161.569,86.157 163.119,84.607 163.119,76.886 162.535,76.302 C74_SFP_DP4.1@162.535,75.679
  Bottom Layer w0.152: 59.512,203.835 59.512,205.624 59.048,206.088 59.048,208.356 59.827,209.135 CN1.30@59.827,210.234
  Bottom Layer w0.254: 59.512,203.987 59.512,203.835 59.512,192.237 63.83,187.919 63.83,185.064 v1(63.627,184.861)
SFP_TX4_P: C73_SFP_DP4.1 CN1.29 | length 224.6
  Top Layer w0.254: v1(64.44,184.861) 64.237,184.658 64.237,113.665 77.927,99.974 92.278,99.974 96.774,95.479 125.222,95.479 130.404,90.297 144.78,90.297 148.514,86.563 161.738,86.563 163.525,84.776 163.525,76.886 164.109,76.302 C73_SFP_DP4.1@164.109,75.679
  Bottom Layer w0.152: CN1.29@59.827,211.834 60.605,211.055 60.605,209.888 60.173,209.456 60.173,208.811 60.605,208.379 60.605,206.088 59.919,205.402 59.919,203.733
  Bottom Layer w0.254: 59.919,203.987 59.919,203.733 59.919,192.405 64.262,188.062 ; 64.262,185.369 64.262,188.062 ; v1(64.44,184.861) 64.262,185.039 64.262,188.062
SFP_TX5_N: C74_SFP_DP5.1 CN1.144 | length 235.4
  Top Layer w0.152: 57.429,203.606 57.429,206.286 CN1.144@57.577,206.434
  Top Layer w0.254: 57.429,203.606 57.429,192.253 62.687,186.995 68.402,186.995 70.587,184.81 70.587,116.443 82.382,104.648 96.783,104.648 101.66,99.771 128.864,99.771 133.537,95.098 147.075,95.098 151.012,91.161 163.855,91.161 167.208,87.808 181.28,87.808 185.217,83.871 185.217,76.886 184.633,76.302 C74_SFP_DP5.1@184.633,75.679
SFP_TX5_P: C73_SFP_DP5.1 CN1.145 | length 237.5
  Top Layer w0.152: CN1.145@57.577,208.034 58.355,207.255 58.355,206.088 57.836,205.569 57.836,203.606
  Top Layer w0.254: 57.836,203.606 57.836,192.421 62.856,187.401 68.571,187.401 70.993,184.979 70.993,116.611 82.55,105.054 96.952,105.054 101.829,100.178 129.032,100.178 133.706,95.504 147.244,95.504 151.181,91.567 164.024,91.567 167.377,88.214 181.448,88.214 185.623,84.039 185.623,76.886 186.207,76.302 C73_SFP_DP5.1@186.207,75.679
SFP_TX6_N: C74_SFP_DP6.1 CN1.36 | length 253.7
  Top Layer w0.254: v1(76.657,184.582) 76.86,184.379 76.86,117.18 84.668,109.372 99.882,109.372 104.734,104.521 132.191,104.521 136.814,99.898 149.717,99.898 153.857,95.758 166.913,95.758 170.443,92.227 184.785,92.227 192.608,84.404 204.267,84.404 207.315,81.356 207.315,76.886 206.731,76.302 C74_SFP_DP6.1@206.731,75.679
  Bottom Layer w0.152: 64.071,203.987 64.071,205.566 63.548,206.088 63.548,208.356 64.327,209.135 CN1.36@64.327,210.234
  Bottom Layer w0.254: 64.071,203.987 64.071,195.755 68.64,191.186 73,191.186 76.81,187.376 76.81,186.233 ; v1(76.657,184.582) 76.81,184.734 76.81,186.233 ; 76.81,185.344 76.81,186.233
SFP_TX6_P: C73_SFP_DP6.1 CN1.35 | length 255
  Top Layer w0.254: v1(77.47,184.582) 77.267,184.379 77.267,117.348 84.836,109.779 100.051,109.779 104.902,104.927 132.359,104.927 136.982,100.305 149.885,100.305 154.026,96.164 167.081,96.164 170.612,92.634 184.953,92.634 192.777,84.811 204.435,84.811 207.721,81.525 207.721,76.886 208.305,76.302 C73_SFP_DP6.1@208.305,75.679
  Bottom Layer w0.152: CN1.35@64.327,211.834 65.105,211.055 65.105,209.888 64.673,209.456 64.673,208.811 65.105,208.379 65.105,206.088 64.477,205.46 64.477,203.86
  Bottom Layer w0.254: 64.477,203.987 64.477,203.86 64.477,195.924 68.809,191.592 73.168,191.592 77.216,187.544 77.216,185.141 77.267,185.09 77.267,184.785 v1(77.47,184.582)
SFP_TX7_N: C74_SFP_DP7.1 CN1.138 | length 269.6
  Top Layer w0.152: 61.798,203.581 61.798,205.68 62.078,205.959 CN1.138@62.077,206.434 CN1.138@62.077,206.434
  Top Layer w0.254: 61.798,203.657 61.798,203.581 61.798,195.285 64.779,192.303 74.727,192.303 81.788,185.242 81.788,121.498 89.163,114.122 103.057,114.122 107.909,109.271 134.706,109.271 138.846,105.131 151.308,105.131 156.396,100.043 169.994,100.043 173.39,96.647 187.665,96.647 195.412,88.9 222.047,88.9 229.667,81.28 229.667,76.886 229.083,76.302 C74_SFP_DP7.1@229.083,75.679
SFP_TX7_P: C73_SFP_DP7.1 CN1.139 | length 271.6
  Top Layer w0.152: CN1.139@62.077,208.034 62.855,207.255 62.855,206.088 62.205,205.438 62.205,203.479
  Top Layer w0.254: 62.205,203.479 62.205,195.453 64.948,192.71 74.895,192.71 82.194,185.411 82.194,121.666 89.332,114.529 103.226,114.529 108.077,109.677 134.874,109.677 139.014,105.537 151.476,105.537 156.564,100.449 170.163,100.449 173.558,97.053 187.833,97.053 195.58,89.306 222.215,89.306 230.073,81.448 230.073,76.886 230.657,76.302 C73_SFP_DP7.1@230.657,75.679
TX_DISABLE_SFP_DP0: CN8_SFP_DP0.3 IC8_SFP_DP0.6 RP1_SFP_DP0.7 | length 19.8
  Top Layer w0.152: CN8_SFP_DP0.3@62.709,61.494 62.709,58.195 64.821,56.083 64.821,50.749 63.881,49.809 v1(63.881,48.768)
  Bottom Layer w0.152: IC8_SFP_DP0.6@61.21,46.466 62.601,46.466 62.611,46.457 ; 62.438,46.457 62.611,46.457 ; RP1_SFP_DP0.7@63.716,49.86 63.716,48.933 v1(63.881,48.768) 63.881,47.396 62.941,46.457 62.611,46.457
TX_DISABLE_SFP_DP1: CN8_SFP_DP1.3 IC8_SFP_DP1.6 RP1_SFP_DP1.7 | length 19.8
  Top Layer w0.152: CN8_SFP_DP1.3@84.807,61.494 84.807,58.195 86.919,56.083 86.919,50.749 85.979,49.809 v1(85.979,48.768)
  Bottom Layer w0.152: IC8_SFP_DP1.6@83.308,46.466 84.699,46.466 84.709,46.457 ; 84.536,46.457 84.709,46.457 ; RP1_SFP_DP1.7@85.814,49.86 85.814,48.933 v1(85.979,48.768) 85.979,47.396 85.039,46.457 84.709,46.457
TX_DISABLE_SFP_DP2: CN8_SFP_DP2.3 IC8_SFP_DP2.6 RP1_SFP_DP2.7 | length 19.8
  Top Layer w0.152: CN8_SFP_DP2.3@119.605,61.494 119.605,58.195 121.717,56.083 121.717,50.749 120.777,49.809 v1(120.777,48.768)
  Bottom Layer w0.152: IC8_SFP_DP2.6@118.106,46.466 119.497,46.466 119.507,46.457 ; 119.334,46.457 119.507,46.457 ; RP1_SFP_DP2.7@120.612,49.86 120.612,48.933 v1(120.777,48.768) 120.777,47.396 119.837,46.457 119.507,46.457
TX_DISABLE_SFP_DP3: CN8_SFP_DP3.3 IC8_SFP_DP3.6 RP1_SFP_DP3.7 | length 19.9
  Top Layer w0.152: CN8_SFP_DP3.3@142.084,61.494 142.084,58.195 144.196,56.083 144.196,50.749 143.256,49.809 v1(143.256,48.768)
  Bottom Layer w0.152: IC8_SFP_DP3.6@140.585,46.466 141.976,46.466 141.986,46.457 ; 141.813,46.457 141.986,46.457 ; RP1_SFP_DP3.7@143.091,49.86 143.091,48.781 v1@143.256,48.616 ; v1(143.256,48.768) v1@143.256,48.616 ; 141.986,46.457 142.316,46.457 143.256,47.396 v1@143.256,48.616
TX_DISABLE_SFP_DP4: CN8_SFP_DP4.3 IC8_SFP_DP4.6 RP1_SFP_DP4.7 | length 19.8
  Top Layer w0.152: CN8_SFP_DP4.3@164.182,61.494 164.182,58.195 166.294,56.083 166.294,50.749 165.354,49.809 v1(165.354,48.768)
  Bottom Layer w0.152: IC8_SFP_DP4.6@162.683,46.466 164.074,46.466 164.084,46.457 ; 163.911,46.457 164.084,46.457 ; RP1_SFP_DP4.7@165.189,49.86 165.189,48.933 v1(165.354,48.768) 165.354,47.396 164.414,46.457 164.084,46.457
TX_DISABLE_SFP_DP5: CN8_SFP_DP5.3 IC8_SFP_DP5.6 RP1_SFP_DP5.7 | length 19.8
  Top Layer w0.152: CN8_SFP_DP5.3@186.28,61.494 186.28,58.195 188.392,56.083 188.392,50.749 187.452,49.809 v1(187.452,48.768)
  Bottom Layer w0.152: IC8_SFP_DP5.6@184.781,46.466 186.172,46.466 186.182,46.457 ; 186.009,46.457 186.182,46.457 ; RP1_SFP_DP5.7@187.287,49.86 187.287,48.933 v1(187.452,48.768) 187.452,47.396 186.512,46.457 186.182,46.457
TX_DISABLE_SFP_DP6: CN8_SFP_DP6.3 IC8_SFP_DP6.6 RP1_SFP_DP6.7 | length 19.8
  Top Layer w0.152: CN8_SFP_DP6.3@208.378,61.494 208.378,58.195 210.49,56.083 210.49,50.749 209.55,49.809 v1(209.55,48.768)
  Bottom Layer w0.152: IC8_SFP_DP6.6@206.879,46.466 208.27,46.466 208.28,46.457 ; 208.107,46.457 208.28,46.457 ; RP1_SFP_DP6.7@209.385,49.86 209.385,48.933 v1(209.55,48.768) 209.55,47.396 208.61,46.457 208.28,46.457
TX_DISABLE_SFP_DP7: CN8_SFP_DP7.3 IC8_SFP_DP7.6 RP1_SFP_DP7.7 | length 19.8
  Top Layer w0.152: CN8_SFP_DP7.3@230.73,61.494 230.73,58.195 232.842,56.083 232.842,50.749 231.902,49.809 v1(231.902,48.768)
  Bottom Layer w0.152: IC8_SFP_DP7.6@229.231,46.466 230.622,46.466 230.632,46.457 ; 230.459,46.457 230.632,46.457 ; RP1_SFP_DP7.7@231.737,49.86 231.737,48.933 v1(231.902,48.768) 231.902,47.396 230.962,46.457 230.632,46.457
TX_FAULT_SFP_DP0: CN8_SFP_DP0.2 IC8_SFP_DP0.7 RP1_SFP_DP0.8 | length 19.3
  Top Layer w0.152: CN8_SFP_DP0.2@61.909,61.494 61.909,58.564 64.516,55.956 64.516,51.765 62.89,50.14 v1(62.89,48.26)
  Bottom Layer w0.152: IC8_SFP_DP0.7@61.21,47.117 62.713,47.117 62.89,47.295 v1(62.89,48.26) 62.916,48.285 RP1_SFP_DP0.8@62.916,49.86
TX_FAULT_SFP_DP1: CN8_SFP_DP1.2 IC8_SFP_DP1.7 RP1_SFP_DP1.8 | length 19.3
  Top Layer w0.152: CN8_SFP_DP1.2@84.007,61.494 84.007,58.564 86.614,55.956 86.614,51.765 84.988,50.14 v1(84.988,48.26)
  Bottom Layer w0.152: IC8_SFP_DP1.7@83.308,47.117 84.811,47.117 84.988,47.295 84.988,48.108 85.014,48.133 RP1_SFP_DP1.8@85.014,49.86
TX_FAULT_SFP_DP2: CN8_SFP_DP2.2 IC8_SFP_DP2.7 RP1_SFP_DP2.8 | length 19.3
  Top Layer w0.152: CN8_SFP_DP2.2@118.805,61.494 118.805,58.564 121.412,55.956 121.412,51.765 119.786,50.14 v1(119.786,48.26)
  Bottom Layer w0.152: IC8_SFP_DP2.7@118.106,47.117 119.609,47.117 119.786,47.295 v1(119.786,48.26) 119.812,48.285 RP1_SFP_DP2.8@119.812,49.86
TX_FAULT_SFP_DP3: CN8_SFP_DP3.2 IC8_SFP_DP3.7 RP1_SFP_DP3.8 | length 19.3
  Top Layer w0.152: CN8_SFP_DP3.2@141.284,61.494 141.284,58.564 143.891,55.956 143.891,51.765 142.265,50.14 v1(142.265,48.26)
  Bottom Layer w0.152: IC8_SFP_DP3.7@140.585,47.117 142.088,47.117 142.265,47.295 v1(142.265,48.26) 142.291,48.285 RP1_SFP_DP3.8@142.291,49.86
TX_FAULT_SFP_DP4: CN8_SFP_DP4.2 IC8_SFP_DP4.7 RP1_SFP_DP4.8 | length 19.3
  Top Layer w0.152: CN8_SFP_DP4.2@163.382,61.494 163.382,58.564 165.989,55.956 165.989,51.765 164.363,50.14 v1(164.363,48.26)
  Bottom Layer w0.152: IC8_SFP_DP4.7@162.683,47.117 164.186,47.117 164.363,47.295 v1(164.363,48.26) 164.389,48.285 RP1_SFP_DP4.8@164.389,49.86
TX_FAULT_SFP_DP5: CN8_SFP_DP5.2 IC8_SFP_DP5.7 RP1_SFP_DP5.8 | length 19.3
  Top Layer w0.152: CN8_SFP_DP5.2@185.48,61.494 185.48,58.564 188.087,55.956 188.087,51.765 186.461,50.14 v1(186.461,48.26)
  Bottom Layer w0.152: IC8_SFP_DP5.7@184.781,47.117 186.284,47.117 186.461,47.295 v1(186.461,48.26) 186.487,48.285 RP1_SFP_DP5.8@186.487,49.86
TX_FAULT_SFP_DP6: CN8_SFP_DP6.2 IC8_SFP_DP6.7 RP1_SFP_DP6.8 | length 19.3
  Top Layer w0.152: CN8_SFP_DP6.2@207.578,61.494 207.578,58.564 210.185,55.956 210.185,51.765 208.559,50.14 v1(208.559,48.26)
  Bottom Layer w0.152: IC8_SFP_DP6.7@206.879,47.117 208.382,47.117 208.559,47.295 v1(208.559,48.26) 208.585,48.285 RP1_SFP_DP6.8@208.585,49.86
TX_FAULT_SFP_DP7: CN8_SFP_DP7.2 IC8_SFP_DP7.7 RP1_SFP_DP7.8 | length 19.3
  Top Layer w0.152: CN8_SFP_DP7.2@229.93,61.494 229.93,58.564 232.537,55.956 232.537,51.765 230.911,50.14 v1(230.911,48.26)
  Bottom Layer w0.152: IC8_SFP_DP7.7@229.231,47.117 230.734,47.117 230.911,47.295 v1(230.911,48.26) 230.937,48.285 RP1_SFP_DP7.8@230.937,49.86
pads on no net: CN1.3 CN1.6 CN1.8 CN1.11 CN1.12 CN1.41 CN1.44 CN1.45 CN1.47 CN1.48 CN1.50 CN1.51 CN1.53 CN1.54 CN1.59 CN1.60 CN1.62 CN1.63 CN1.65 CN1.66 CN1.68 CN1.69 CN1.74 CN1.75 CN1.77 CN1.78 CN1.80 CN1.81 CN1.83 CN1.86A CN1.87 CN1.88 CN1.89A CN1.90 CN1.91 CN1.93 CN1.94 CN1.96 CN1.97 CN1.99 CN1.100 CN1.102 CN1.103 CN1.108 CN1.109 CN1.111 CN1.112 CN1.114 CN1.115 CN1.117 CN1.118 CN1.120 CN1.121 CN1.123 CN1.124 CN1.126 CN1.127 CN1.129 CN1.130 CN1.132 CN1.133 CN1.165 CN1.166 CN1.167 CN1.168 CN1.169 CN1.170A CN1.M1 CN1.M2 CN1.M3 CN1.M4 CN1.nc CN8_SFP_DP0. CN8_SFP_DP1. CN8_SFP_DP2. CN8_SFP_DP3. CN8_SFP_DP4. CN8_SFP_DP5. CN8_SFP_DP6. CN8_SFP_DP7. IC5.4 IC6.4 IC7.4 IC8.9 IC8.10 IC8.11 IC8.12 IC8.13 IC9_SFP_DP0.4 IC9_SFP_DP1.4 IC9_SFP_DP2.4 IC9_SFP_DP3.4 IC9_SFP_DP4.4 IC9_SFP_DP5.4 IC9_SFP_DP6.4 IC9_SFP_DP7.4 IC10_SFP_DP0.4 IC10_SFP_DP1.4 IC10_SFP_DP2.4 IC10_SFP_DP3.4 IC10_SFP_DP4.4 IC10_SFP_DP5.4 IC10_SFP_DP6.4 IC10_SFP_DP7.4 IC11.2 IC11.3 IC13.4
copper on no net: | length 30
  Top Layer w0.254: 249,44 249,47 252,47 252,44 249,44
  Bottom Layer w0.254: 249,53 252,53 ; 249,53 252,53 ; 249,53 249,56 252,56 252,53 ; 249,53 252,53

## Polygon pours and split planes (outlines as drawn)
+12V_PSU on Top Layer "poly_ext_gnd" (solid, pour order 1008): 100.99,197.561 105.639,197.561 106.02,197.942 106.02,199.238 105.715,199.542 101.625,199.542 101.244,199.161 100.762,198.679 100.762,197.79
+3V3_MP on Top Layer "poly_ext_gnd" (solid, pour order 1007): 104.369,193.396 105.74,193.396 105.994,193.65 105.994,195.428 105.715,195.707 105.435,195.986 103.353,195.986 103.353,194.615 103.607,194.361 103.886,194.081 103.886,193.904
+3V3_MP on Top Layer "poly_ext_gnd" (solid, pour order 1006): 102.337,196.85 99.035,196.85 97.993,197.891 97.917,197.968 95.453,197.968 95.301,197.968 94.818,197.485 94.818,194.031 95.174,193.675 95.428,193.421 96.545,193.421 97.663,193.421 98.933,194.691 99.035,194.793 101.473,194.793 103.454,194.793 103.886,195.224 103.886,196.52 103.581,196.825 103.556,196.85 102.032,196.85
GND on Top Layer "poly_ext_gnd" (solid, pour order 1005): 99,140.5 108.5,140.5 109,140 109,138 108.5,137.5 99.5,137.5 99,138
+3V3 on Top Layer "poly_ext_gnd" (solid, pour order 1004): 112.5,138.5 118.5,138.5 119,139 119,142.5 118.5,143 112.5,143 109,146.5 107.5,148 102.5,148 101,148 99,146 99,142 99.5,141.5 103.5,141.5 109.5,141.5 111,140
GND on Top Layer "poly_ext_gnd" (solid, pour order 1003): 110.642,164.262 102.108,164.262 100.178,162.331 100.178,152.146 100.838,151.486 101.625,150.698 104.445,150.698 105.969,150.698 106.756,151.486 106.959,151.689 106.959,159.283 107.417,159.741 109.779,159.741
+12V_PSU on Top Layer "poly_ext_gnd" (solid, pour order 1002): 114.452,159.487 107.95,159.487 107.518,159.055 107.467,159.004 107.467,157.607 107.467,157.302 107.798,156.972 107.848,156.921 110.185,156.921 111.76,156.921 112.319,157.48 112.928,158.09 115.646,158.09 115.646,159.487
GND on Top Layer "poly_ext_gnd" (solid, pour order 1001): 116.5,153 117,152.5 119.75,152.5 120,152.75 120,156 119.25,156.75 118.75,156.75 118.25,157.25 118.25,163.75 117.75,164.25 108.5,164.25 108,163.75 108,161 109.25,159.75 116,159.75 116.5,159.25
NetC84_2 on Top Layer "poly_ext_gnd" (solid, pour order 1000): 112.25,148.5 119,148.5 119.25,148.75 119.25,151.75 118.75,152.25 116.75,152.25 116.25,152.75 116,153 116,157.25 115.25,158 113.5,158 113,158 112.75,157.75 112,157 112,148.75
+12V_PSU on Top Layer "poly_ext_gnd" (solid, pour order 1000): 117,182 123.75,182 123.75,176 117,176
+12V_MCH on Top Layer "poly_ext_gnd" (solid, pour order 1001): 111.5,190.75 119,190.75 119.5,190.25 119.5,185 116.75,182.25 116.5,182 116.5,179.25 116.5,178.75 116,178.25 114.75,178.25 114.25,178.75 114.25,181.75 114.25,183 113.25,184 111,186.25 111,190.25
+3V3_MP on Bottom Layer "poly_ext_gnd" (solid, pour order 1009): 99.695,214.579 102.235,214.579 102.667,214.147 103.302,213.512 103.302,206.426 103.302,202.844 101.524,201.066 97.714,201.066 96.114,199.466 95.682,199.034 95.682,195.809 95.682,194.056 94.971,193.345 94.691,193.345 94.234,193.802 93.904,194.132 93.904,199.517 99.695,205.308 99.695,207.442
GND on GND (split plane): 123.95,174.78 116.027,174.78 115.978,174.77 115.936,174.742 108.582,167.388 100.457,167.388 100.407,167.379 100.365,167.351 97.267,164.252 97.239,164.21 97.229,164.16 97.229,137.871 97.239,137.822 97.267,137.78 97.309,137.752 97.358,137.742 97.408,137.752 97.45,137.78 97.478,137.822 97.488,137.871 97.488,164.107 100.511,167.13 108.636,167.13 108.685,167.139 108.727,167.167 116.081,174.521 123.95,174.521 123.95,136.248 109.096,136.248 108.931,136.413 108.889,136.441 108.839,136.451 108.789,136.441 108.747,136.413 108.719,136.371 108.71,136.322 108.719,136.272 108.747,136.23 108.951,136.027 108.993,135.999 109.042,135.989 123.95,135.989 123.95,120.142 123.959,120.042 123.988,119.947 124.036,119.858 124.099,119.781 124.176,119.718 124.265,119.67 124.36,119.641 124.46,119.632 253.49,119.632 253.49,26.52 22.481,26.52 22.481,220.495 123.95,220.495
GND on GND (split plane): 251.871,47.129 249.129,47.129 249.129,49.871 251.871,49.871
+3V3 on POWER (split plane): 56.436,212.138 56.436,209.982 56.446,209.932 56.474,209.89 57.236,209.128 57.278,209.1 57.328,209.09 58.09,209.09 58.139,209.1 58.181,209.128 59.096,210.043 59.124,210.085 59.134,210.134 59.134,212.113 59.896,212.875 66.825,212.875 67.562,212.138 67.562,209.677 67.571,209.627 67.599,209.585 68.285,208.9 68.327,208.872 68.377,208.862 98.829,208.862 104.773,202.918 104.773,200.281 100.609,200.281 100.56,200.272 100.518,200.244 98.791,198.516 98.763,198.474 98.753,198.425 98.753,192.052 94.676,187.975 94.648,187.933 94.638,187.884 94.638,183.921 94.648,183.872 94.676,183.83 97.444,181.061 97.486,181.033 97.536,181.023 101.496,181.023 105.371,177.148 105.371,159 105.38,158.95 105.408,158.908 108.408,155.908 108.45,155.88 108.5,155.871 123.95,155.871 123.95,120.142 123.959,120.042 123.988,119.947 124.036,119.858 124.099,119.781 124.176,119.718 124.265,119.67 124.36,119.641 124.46,119.632 253.49,119.632 253.49,26.52 22.481,26.52 22.481,203.02 37.008,203.02 37.057,203.03 37.099,203.058 43.03,208.989 50.673,208.989 50.723,208.999 50.765,209.027 51.831,210.093 51.859,210.135 51.869,210.185 51.869,212.443 52.378,212.951 55.623,212.951
+12V_MCH on POWER (split plane): 123.95,182.959 108.562,182.959 105.031,186.49 105.031,202.971 105.022,203.021 104.994,203.063 98.974,209.083 98.932,209.111 98.882,209.121 68.43,209.121 67.82,209.731 67.82,212.192 67.811,212.241 67.783,212.283 66.97,213.096 66.928,213.124 66.878,213.134 59.842,213.134 59.793,213.124 59.751,213.096 58.913,212.258 58.885,212.216 58.875,212.166 58.875,210.188 58.036,209.349 57.381,209.349 56.695,210.035 56.695,212.192 56.685,212.241 56.657,212.283 55.768,213.172 55.726,213.2 55.677,213.21 52.324,213.21 52.274,213.2 52.232,213.172 51.648,212.588 51.62,212.546 51.61,212.496 51.61,210.239 50.619,209.248 42.977,209.248 42.927,209.238 42.885,209.21 36.954,203.279 22.481,203.279 22.481,220.495 123.95,220.495